# Altium PCB 垃圾分类组2.PcbDoc
Units mil, origin at the board's own origin, x right, y up, seen from the top; angles counter-clockwise.
Board outline 2362.2 x 3937.01 mil, 2 copper layers (Top Layer, Bottom Layer); 56 components, 33 nets, 284 pads, 48 vias.
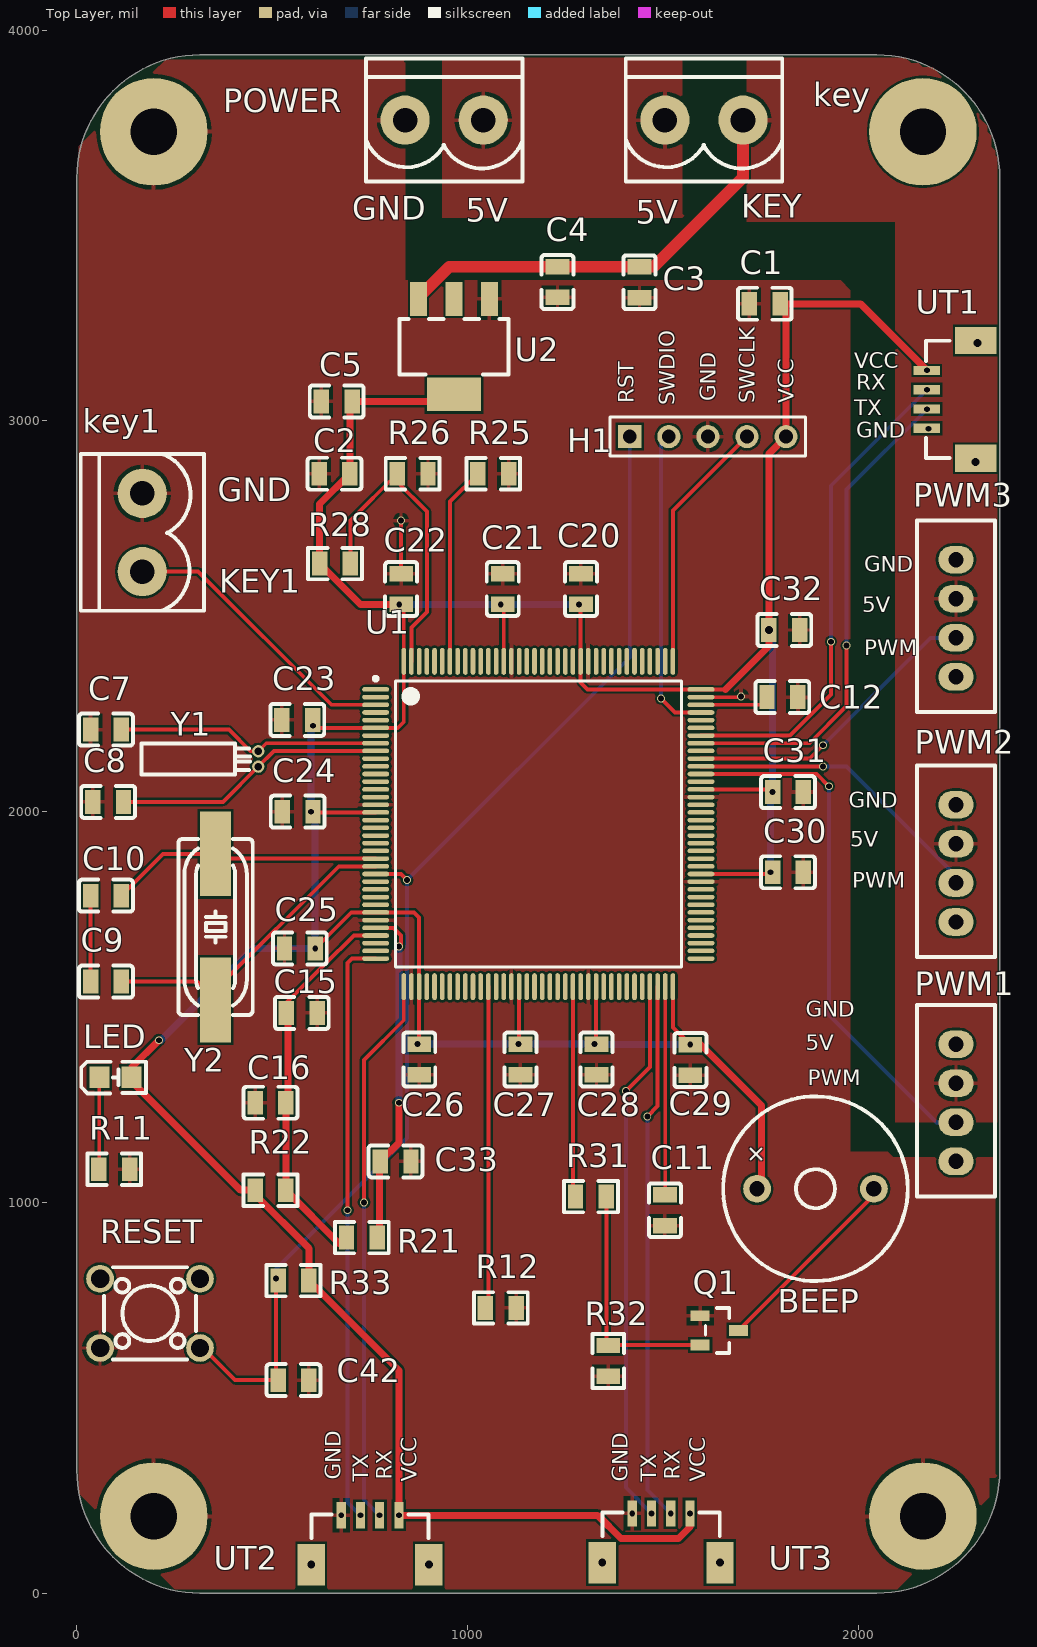
[diagram p0: Top Layer view]
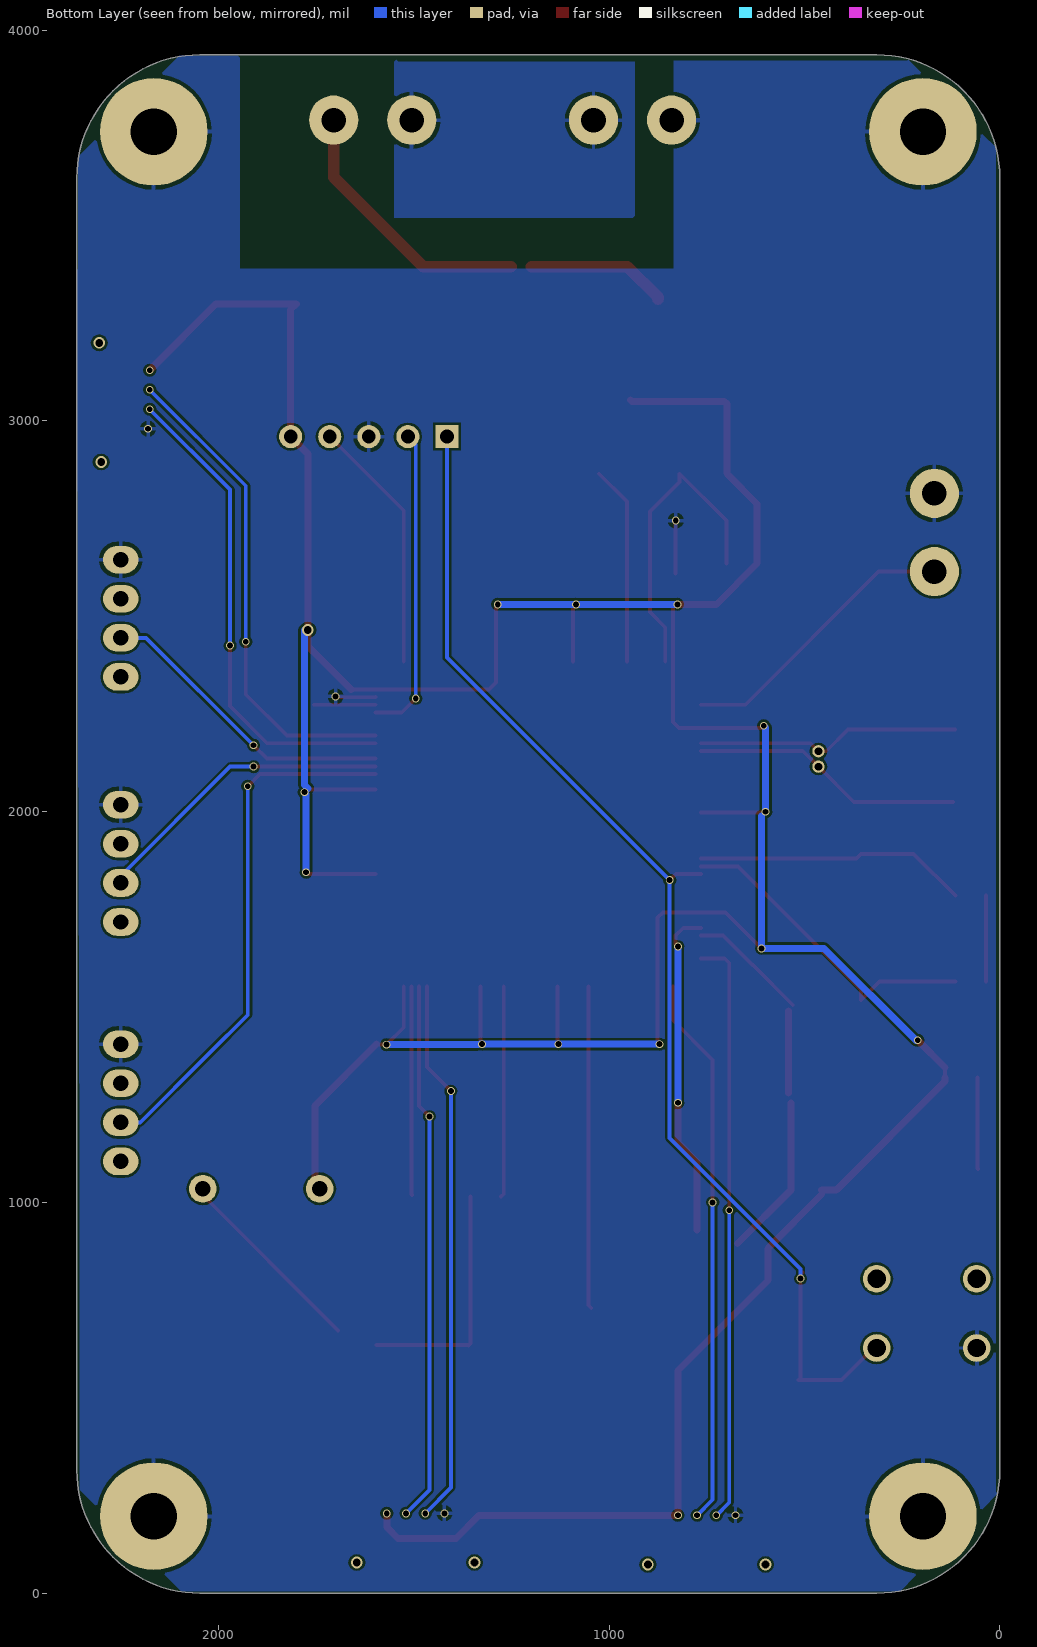
[diagram p1: Bottom Layer view, seen from below]

## Layer stack, top to bottom
Top Solder: solder mask 0.4, Solder Resist, Dk 3.5
Top Layer: signal copper 1.4
Dielectric 1: dielectric 12.6, FR-4, Dk 4.8
Bottom Layer: signal copper 1.4
Bottom Solder: solder mask 0.4, Solder Resist, Dk 3.5

## Board outline
0,314.96 0,3622.05 cw(c314.96,3622.05) 314.96,3937.01 2047.24,3937.01 cw(c2047.24,3622.05) 2362.2,3622.05 2362.2,314.96 cw(c2047.24,314.96) 2047.24,0 314.96,0 cw(c314.96,314.96)

## Design rules (kind name [scope] priority, off if disabled: settings)
Clearance [All] p1: gap=6 ignorepadtopadclearanceinfootprint=FALSE
PolygonConnect [All] p1: connectstyle=Relief reliefconductorwidth=10 reliefentries=4 polygonreliefangle="90 Angle" airgapwidth=10
RoutingVias [All] p1: holewidth=15 width=20 viastyle="Through Hole" minholewidth=15 minwidth=20 maxholewidth=15 maxwidth=20
SolderMaskExpansion [All] p1: expansion=4 istentingtop=FALSE
UnpouredPolygon [All] p1: allowshelved=TRUE
Width Width_1 [InNet('VCC')] p1: maxlimit=50 minlimit=10 preferedwidth=30 minimp=50.000000 maximp=50.000000 favimp=50.000000
Width [All] p2: maxlimit=30 minlimit=10 preferedwidth=10 minimp=50.000000 maximp=50.000000 favimp=50.000000
29 further rules are at their usual default settings.

## Components (designator, comment, footprint, x,y, rotation, side; value= is the part's Value field where it differs from the comment)
BEEP "" 蜂鸣器 1898.52,1038.78 r0 top
C1 "104" C0805 1760.63,3300 r180 top
C2 "104" C0805 659.37,2865 r180 top
C3 "106" C0805 1440,3355 r270 top
C4 "104" C0805 1230,3355.63 r270 top
C5 "106" C0805 665,3050 r180 top
C7 "12pF" C0805 74.37,2210 r0 top
C8 "12pF" C0805 80,2025 r0 top
C9 "22pF" C0805 74.37,1565 r180 top
C10 "22pF" C0805 74.37,1785 r180 top
C11 "225" C0805 1505,980 r270 top
C12 "225" C0805 1805.63,2293.31 r0 top
C15 "104" C0805 575.63,1485 r180 top
C16 "106" C0805 495.63,1255 r0 top
C20 "104" C0805 1290,2570 r90 top
C21 "104" C0805 1090,2570 r90 top
C22 "104" C0805 830,2570 r90 top
C23 "104" C0805 564.11,2235 r180 top
C24 "104" C0805 565,2000 r180 top
C25 "104" C0805 570.63,1650 r180 top
C26 "104" C0805 876.38,1365.63 r270 top
C27 "104" C0805 1135,1365.63 r270 top
C28 "104" C0805 1330,1365.63 r270 top
C29 "104" C0805 1570,1364.37 r270 top
C30 "104" C0805 1820,1845 r0 top
C31 "104" C0805 1820,2050 r0 top
C32 "104" C0805 1810.63,2465 r0 top
C33 "104" C0805 815.63,1105 r0 top
C42 "104" C0805 554.37,545 r180 top
H1 "" HDR1X5 1415,2960 r0 top
key "" Porwer 1605.39,3787.48 r180 top
key1 "" Porwer 150,2715 r270 top
LED "" LED0805BLUE 94.1,1319.45 r0 top
POWER "" Porwer 940.39,3787.48 r180 top
PWM1 "" XH2.54-4 2235,1250 r90 top
PWM2 "" XH2.54-4 2235,1862.72 r90 top
PWM3 "" XH2.54-4 2235,2490 r90 top
Q1 "S8050" S8050 1640,675 r180 top
R11 "680R" R0805 95.63,1085 r180 top
R12 "10K" R0805 1085,730 r0 top
R21 "0R" R0805 729.37,910 r180 top
R22 "0R" R0805 495.63,1031.22 r180 top
R25 "10K" R0805 1065.63,2865 r0 top
R26 "NC" R0805 859.37,2865 r0 top
R28 "0R" R0805 660.63,2635 r180 top
R31 "1K" R0805 1315.63,1015 r0 top
R32 "1K" R0805 1360,594.37 r90 top
R33 "10K" R0805 554.37,800 r0 top
RESET "Key" "KEY - duplicate" 190,730 r180 top
U1 "STM32F407ZET6" LQFP144N 1181.1,1968.5 r0 top
U2 "AMS1117-3.3V" ASM1117（yyh） 960,3195 r90 top
UT1 "" GH1.25_4P 2239.14,3060.13 r90 top
UT2 "" GH1.25_4P 755,135 r0 top
UT3 "" GH1.25_4P 1500,140 r0 top
Y1 "32.768k" 晶振（32.768MHz） 320,2135 r0 top value=8MHz
Y2 "8MHz" 晶振（8MHz） 355,1705 r270 top

## Footprints (in the part's own frame and the unit in brackets; to place one, negate y for a bottom-side part, rotate by r counter-clockwise, add the part's x,y. Pads: shape width x height; smd on the part's side, far side on the other; paste and mask are expansions set on the pad)
ASM1117（yyh） [mm]
  rect 2.2x1.1 smd: 1(2.98,-2.433) 2(2.98,-0.133) 3(2.98,2.167)
  rect 2.2x3.5 smd: 4(-3.218,-0.133)
  silkscreen extent -1.92,-3.68 1.68,3.42
C0805 [mm]
  rect 1x1.55 smd: 1(-1,0) 2(1,0)
  silkscreen extent -1.75,-1.04 1.75,1.04
GH1.25_4P [mil]
  rect 23.6x67 smd: 1(-78.54,64.14) 2(-29.34,64.14) 3(19.87,64.14) 4(69.08,64.14)
  rect 70x106.3 smd: 5(145.85,-61.85) 6(-155.32,-61.85)
  silkscreen extent -155,6 145,66
HDR1X5 [mm] "Connector; Header; 5 Position"
  rect 1.5x1.5 hole 0.9: 1(0,0)
  round 1.5 hole 0.9: 2(2.54,0) 3(5.08,0) 4(7.62,0) 5(10.16,0)
  silkscreen extent -1.27,-1.27 11.43,1.27
"KEY - duplicate" [mm]
  round 1.8 hole 1.2: 1(-3.178,2.606) 2(3.322,2.606) 3(-3.178,-1.894) 4(3.322,-1.894)
  silkscreen extent -2.93,-2.64 3.07,3.36
LED0805BLUE [mil]
  rect 51.2x55.1 smd: 1(45.9,0.55) 2(-36.8,0.55)
  silkscreen extent -83,-40 83,40
LQFP144N [mm]
  oval 1.75x0.297 smd: 1(-10.575,8.75) 2(-10.575,8.25) 3(-10.575,7.75) 4(-10.575,7.25) 5(-10.575,6.75) 6(-10.575,6.25) 7(-10.575,5.75) 8(-10.575,5.25) 9(-10.575,4.75) 10(-10.575,4.25) 11(-10.575,3.75) 12(-10.575,3.25) 13(-10.575,2.75) 14(-10.575,2.25) 15(-10.575,1.75) 16(-10.575,1.25) 17(-10.575,0.75) 18(-10.575,0.25) 19(-10.575,-0.25) 20(-10.575,-0.75) 21(-10.575,-1.25) 22(-10.575,-1.75) 23(-10.575,-2.25) 24(-10.575,-2.75) 25(-10.575,-3.25) 26(-10.575,-3.75) 27(-10.575,-4.25) 28(-10.575,-4.75) 29(-10.575,-5.25) 30(-10.575,-5.75) 31(-10.575,-6.25) 32(-10.575,-6.75) 33(-10.575,-7.25) 34(-10.575,-7.75) 35(-10.575,-8.25) 36(-10.575,-8.75) 73(10.575,-8.75) 74(10.575,-8.25) 75(10.575,-7.75) 76(10.575,-7.25) 77(10.575,-6.75) 78(10.575,-6.25) 79(10.575,-5.75) 80(10.575,-5.25) 81(10.575,-4.75) 82(10.575,-4.25) 83(10.575,-3.75) 84(10.575,-3.25) 85(10.575,-2.75) 86(10.575,-2.25) 87(10.575,-1.75) 88(10.575,-1.25) 89(10.575,-0.75) 90(10.575,-0.25) 91(10.575,0.25) 92(10.575,0.75) 93(10.575,1.25) 94(10.575,1.75) 95(10.575,2.25) 96(10.575,2.75) 97(10.575,3.25) 98(10.575,3.75) 99(10.575,4.25) 100(10.575,4.75) 101(10.575,5.25) 102(10.575,5.75) 103(10.575,6.25) 104(10.575,6.75) 105(10.575,7.25) 106(10.575,7.75) 107(10.575,8.25) 108(10.575,8.75)
  oval 0.297x1.75 smd: 37(-8.75,-10.575) 38(-8.25,-10.575) 39(-7.75,-10.575) 40(-7.25,-10.575) 41(-6.75,-10.575) 42(-6.25,-10.575) 43(-5.75,-10.575) 44(-5.25,-10.575) 45(-4.75,-10.575) 46(-4.25,-10.575) 47(-3.75,-10.575) 48(-3.25,-10.575) 49(-2.75,-10.575) 50(-2.25,-10.575) 51(-1.75,-10.575) 52(-1.25,-10.575) 53(-0.75,-10.575) 54(-0.25,-10.575) 55(0.25,-10.575) 56(0.75,-10.575) 57(1.25,-10.575) 58(1.75,-10.575) 59(2.25,-10.575) 60(2.75,-10.575) 61(3.25,-10.575) 62(3.75,-10.575) 63(4.25,-10.575) 64(4.75,-10.575) 65(5.25,-10.575) 66(5.75,-10.575) 67(6.25,-10.575) 68(6.75,-10.575) 69(7.25,-10.575) 70(7.75,-10.575) 71(8.25,-10.575) 72(8.75,-10.575) 109(8.75,10.575) 110(8.25,10.575) 111(7.75,10.575) 112(7.25,10.575) 113(6.75,10.575) 114(6.25,10.575) 115(5.75,10.575) 116(5.25,10.575) 117(4.75,10.575) 118(4.25,10.575) 119(3.75,10.575) 120(3.25,10.575) 121(2.75,10.575) 122(2.25,10.575) 123(1.75,10.575) 124(1.25,10.575) 125(0.75,10.575) 126(0.25,10.575) 127(-0.25,10.575) 128(-0.75,10.575) 129(-1.25,10.575) 130(-1.75,10.575) 131(-2.25,10.575) 132(-2.75,10.575) 133(-3.25,10.575) 134(-3.75,10.575) 135(-4.25,10.575) 136(-4.75,10.575) 137(-5.25,10.575) 138(-5.75,10.575) 139(-6.25,10.575) 140(-6.75,10.575) 141(-7.25,10.575) 142(-7.75,10.575) 143(-8.25,10.575) 144(-8.75,10.575)
  silkscreen extent -10.7,-9.3 9.3,9.57
Porwer [mil]
  round 125.98 hole 63: 1(-99.61,17.48) 2(100.39,17.48)
  silkscreen extent -200,-140 201,175
R0805 [mm]
  rect 1x1.55 smd: 1(-1,0) 2(1,0)
  silkscreen extent -1.75,-1.02 1.75,1.02
S8050 [mil]
  rect 49.21x27.56 smd: 1(45,-34.8) 2(45,40) 3(-53.4,2.6)
  silkscreen extent -30,-55 31,60
XH2.54-4 [mm]
  oval 1.8x2.3 hole 1: 1(3.937,-0.381) 2(1.397,-0.381) 3(-1.143,-0.381) 4(-3.683,-0.381)
  silkscreen extent -5.97,-2.92 6.48,2.16
晶振（8MHz） [mm]
  rect 5.5x2 smd: 1(-4.75,0) 2(4.75,0)
  silkscreen extent -5.72,-2.41 5.72,2.41
晶振（32.768MHz） [mm]
  round 0.8 hole 0.5: 1(3.664,0.5) 2(3.664,-0.5)
  silkscreen extent -3.94,-1 3.13,1
蜂鸣器 [mm]
  round 1.8 hole 1: 1(-4.006,-0.096) 2(3.594,-0.096)
  silkscreen extent -6.2,-6.1 5.79,5.9

## Part data
BEEP: library part BEEP
C1 C7 C8 C9 C10 C11 C12 C15 C16 C20 C21 C22 C23 C24 C25 C26 C27 C28 C29 C30 C31 C32 C33 C42: library part CAP, "Capcitor"
C2: library part Cap, "Capacitor", LatestRevisionDate=17-Jul-2002, LatestRevisionNote="Re-released for DXP Platform.", PackageReference=RAD-0.3, Published=8-Jun-2000, Publisher="Altium Limited"
C3 C4 C5: library part 0805C, "Capacitor", 0805=pf
H1: library part SWD
key key1: library part "Header 2", "Header, 2-Pin", LatestRevisionDate=17-Jul-2002, LatestRevisionNote="Re-released for DXP Platform.", Publisher="Altium Limited"
LED: library part LED2, "Typical RED, GREEN, YELLOW, AMBER GaAs LED", LatestRevisionDate=17-Jul-2002, LatestRevisionNote="Re-released for DXP Platform.", PackageDescription="SM LED; 2 Flat Leads", PackageReference=3.2X1.6X1.1, PackageVersion=Feb-2002, Published=8-Jun-2000, Publisher="Altium Limited"
POWER: library part dianyuan
PWM1 PWM2 PWM3: library part pwm
Q1: library part 2N3904, "NPN General Purpose Amplifier", ComponentLink1Description="Manufacturer Link", ComponentLink1URL=http://www.fairchildsemi.com/, ComponentLink2Description=Datasheet, ComponentLink2URL=http://www.fairchildsemi.com/ds/2N%2F2N3904.pdf, DatasheetVersion=1997, LatestRevisionDate=15-Jan-2003, LatestRevisionNote="PCB Footprint 'BCY-W3/D4.7' replaced", PackageDescription="TO, Flat Index; 3 In-Line, Axial Leads; Body Dia. 4.5mm; Leads 0.51 x 0.48 mm (max)", PackageReference=TO-92A, PackageVersion=Sep-1998, Published=8-Jun-2000, Publisher="Altium Limited"
R11 R12 R21 R22 R25 R26 R28 R31 R32 R33: library part Res2, "Resistor"
RESET: library part Jumper, "Jumper Wire", LatestRevisionDate=17-Jul-2002, LatestRevisionNote="Re-released for DXP Platform.", PackageReference=RAD-0.2, Published=24-Mar-1999, Publisher="Altium Limited"
U2: library part 11
UT1 UT2 UT3: library part GH1.25_4P_ckou
Y1: library part CRYSTAL, "Crystal 8MHz PLUG"
Y2: library part XTAL, "Crystal Oscillator"

## Free pads (board coordinates)
  round 275.59 hole 118.11: 3(196.85,196.85) 3(196.85,3740.16) 3(2165.35,196.85) 3(2165.35,3740.16)

## Via types
v1: diameter 20, hole 15, Top Layer to Bottom Layer, 41 vias
v2: diameter 30, hole 20, Top Layer to Bottom Layer, 7 vias

## Nets (pads, with @x,y where several pads share a name; then routed paths per layer and width w, separated by ;. In a path a pad name is that pad's centre, name@x,y a point inside that pad or via, vN(x,y) a via of type N, cw(c..) or ccw(c..) an arc to the next point about the centre after c; other vN are vias at no path point)
+5: key.2 POWER.1
BEEP: R31.1 U1.59 | length 539.9
  Top Layer w10: U1.59 1269.68,1021.58 R31.1
BOOT0: R25.1 U1.138 | length 509.8
  Top Layer w10: U1.138 954.72,2793.46 R25.1
BOOT1: R12.1 U1.48 | length 825.3
  Top Layer w10: R12.1 1053.15,737.52 U1.48
GND: C1.2 C2.2 C3.2 C4.2 C5.2 C7.1 C8.1 C11.2 C12.2 C15.1 C16.1 C20.2 C21.2 C22.2 C23.2 C24.2 C25.2 C26.2 C27.2 C28.2 C29.2 C30.2 C31.2 C32.2 C33.2 C42.1 H1.3 key1.1 pad.3 POWER.2 PWM1.1 PWM2.1 PWM3.1 Q1.1 R11.1 R12.2 R25.2 R26.2 R32.1 RESET.2 U1.16 U1.31 U1.38 U1.51 U1.61 U1.83 U1.94 U1.107 U1.120 U1.130 U2.1 UT1.1 UT2.1 UT3.1 | length 239.4
  Top Layer w10: v1(829.45,2745) 830,2744.45 C22.2 ; U1.107 1597.76,2292.99 1697.99,2292.99 v1(1700,2295)
  other v1: 676.46,199.14 1421.46,204.14 2180,2980
KEY: C3.1 C4.1 key.1 PWM1.2 PWM2.2 PWM3.2 U2.3 | length 1055.5
  Top Layer w30: U2.3 874.69,3316.42 953.27,3395 1198.74,3395 ; C4.1@1251.26,3395 1476.26,3395 1705,3623.74 key.1
KEY1: key1.2 U1.3 | length 738.5
  Top Layer w10: key1.2 310.39,2614.61 651.38,2273.62 U1.3
NetBEEP_2: BEEP.2 Q1.3 | length 507.1
  Top Layer w10: Q1.3 2051.48,1030.48 BEEP.2@2051.48,1031.22
NetC9_1: C9.1 U1.24 Y2.2 | length 828.1
  Top Layer w10: C9.1 307.99,1565 Y2.2 355,1545 670.24,1860.24 U1.24
NetC9_2: C9.2 C10.2 | length 220
  Top Layer w10: C9.2 C10.2
NetC10_1: C10.1 U1.23 Y2.1 | length 700.4
  Top Layer w10: C10.1 220.75,1892.01 Y2.1 367.09,1879.92 U1.23
NetC11_1: C11.1 U1.71 | length 533.2
  Top Layer w10: C11.1 1505.91,1020.28 U1.71
NetC12_1: C12.1 U1.106 | length 157.4
  Top Layer w10: U1.106 C12.1@1754.88,2273.62
NetLED_2: LED.2 R11.2 | length 235.4
  Top Layer w10: R11.2 57.3,1086.04 LED.2
NetQ1_2: Q1.2 R31.2 R32.2 | length 618.9
  Top Layer w10: R31.2 1355,638.74 R32.2 1361.26,635 Q1.2
NetR26_1: R26.1 R28.1 U1.143 | length 807.5
  Top Layer w10: R28.1 700,2745 R26.1 820,2843.9 895.67,2768.23 895.67,2510.94 856.3,2471.57 U1.143
PA2: U1.36 UT2.2 | length 1504.1
  Top Layer w10: v1(692.5,980) 692.5,1612.5 704.02,1624.02 U1.36
  Bottom Layer w10: v1(692.5,980) 692.5,232.3 v1(725.66,199.14)
PA3: U1.37 UT2.3 | length 1411.6
  Top Layer w10: v1(735,1000) 735,1364.69 836.61,1466.3 U1.37
  Bottom Layer w10: v1(735,1000) 735,239.01 v1(774.87,199.14)
PA9: U1.101 UT1.2 | length 1257.1
  Top Layer w10: U1.101 1875.2,2175.2 1970,2270 v1(1970,2425)
  Bottom Layer w10: v1(1970,2425) 1970,2824.14 v1(2175.86,3030)
PA10: U1.102 UT1.3 | length 1257.9
  Top Layer w10: U1.102 1824.88,2194.88 1930,2300 v1(1930,2435)
  Bottom Layer w10: v1(1930,2435) 1930,2834.14 v1(2175.86,3080)
PB10: U1.69 UT3.2 | length 1400.7
  Top Layer w10: v1(1405,1285) 1466.54,1346.54 U1.69
  Bottom Layer w10: v1(1405,1285) 1405,269.8 v1(1470.66,204.14)
PB11: U1.70 UT3.3 | length 1383.7
  Top Layer w10: v1(1460,1220) 1486.22,1246.22 U1.70
  Bottom Layer w10: v1(1460,1220) 1460,264.01 v1(1519.87,204.14)
PC7: PWM1.3 U1.97 | length 1364.5
  Top Layer w10: U1.97 1893.54,2096.46 v1(1925,2065)
  Bottom Layer w10: v1(1925,2065) 1925,1480 2025.18,1379.82 2200,1205 PWM1.3
PC8: PWM2.3 U1.98 | length 786.5
  Top Layer w10: U1.98 1909.18,2116.14 v1(1910,2115.32)
  Bottom Layer w10: v1(1910,2115.32) 1970,2115.32 2250,1835.32 PWM2.3
PC9: PWM3.3 U1.99 | length 782
  Top Layer w10: U1.99 1875.83,2135.83 v1(1910,2170)
  Bottom Layer w10: v1@1909,2171 v1(1910,2170) 2185,2445 PWM3.3
PC14: C7.2 U1.8 Y1.1 | length 681.2
  Top Layer w10: C7.2@115,2210 388.92,2210 444.23,2154.69 Y1.1 484.74,2175.2 U1.8
PC15: C8.2 U1.9 Y1.2 | length 699.5
  Top Layer w10: C8.2 373.91,2025 Y1.2 504.42,2155.51 U1.9
RESET: C42.2 H1.1 R33.1 RESET.1 U1.25 | length 3145.2
  Top Layer w10: RESET.1@305.12,657.4 305.12,644.88 405,545 C42.2 510,550 R33.1@510,790 ; R33.1@505,820.63 510,815.63 v1(510,805) ; U1.25 829.45,1840.55 v1(845,1825)
  Bottom Layer w10: v1(510,805) 510,830 845.08,1165.08 845.08,1663.7 845,1663.78 v1(845,1825) 1415,2395 H1.1
SWCLK: H1.4 U1.109 | length 653.6
  Top Layer w10: U1.109 1525.59,2770.59 H1.4
SWDIO: H1.2 U1.105 | length 795.9
  Top Layer w10: v1(1495,2289.67) 1530.73,2253.94 U1.105
  Bottom Layer w10: v1(1495,2289.67) 1495,2940 H1.2
VCC: BEEP.1 C1.1 C2.1 C5.1 C20.1 C21.1 C22.1 C23.1 C24.1 C25.1 C26.1 C27.1 C28.1 C29.1 C30.1 C31.1 C32.1 H1.5 LED.1 R22.2 R28.2 R33.2 U1.6 U1.17 U1.30 U1.39 U1.52 U1.62 U1.72 U1.84 U1.95 U1.108 U1.121 U1.131 U1.144 U2.4 UT1.4 UT2.4 UT3.4 | length 11037.7
  Top Layer w10: LED.1 LED.1@140,1345 ; R22.2@456.26,1020 R22.2 ; v1(599.37,2000) 601.34,1998.03 U1.17 ; v1(604.37,2220) 609.8,2214.57 U1.6 821.18,2214.57 836.61,2230 U1.144 836.61,2524.02 C22.1 ; v1(610,1650) 702.13,1742.13 U1.30 862.56,1742.13 875.98,1728.7 U1.39 875.98,1405.4 C26.1 ; C21.1 1092.52,2528.11 U1.131 ; v1(1130,1405) 1131.89,1406.89 U1.52 ; C20.1 1289.37,2530 U1.121 1289.37,2330.63 1307.01,2312.99 U1.108 1660,2312.99 ; U1.62 1328.74,1406.26 C28.1 ; U1.72 1525.59,1448.15 v1(1570,1403.74) 1593.74,1403.74 C29.1@1595,1405 ; U1.84 1771.18,1840.55 v1(1775.63,1845) ; U1.95 1773.54,2057.09 C31.1
  Top Layer w18: LED.1 140,1310 418.78,1031.22 R22.2 ; LED.1@140,1345 v1(210,1415) ; R22.2@456.26,1020 593.74,882.52 R33.2 824.08,569.66 v1(824.08,199.14) 1333.05,199.14 1392.19,140 1540,140 1569.08,169.08 v1(1569.08,204.14) ; v1(825,2530.63) 725.63,2530.63 R28.2 621.26,2787.52 C2.1 698.74,3044.37 C5.1 941.69,3050 U2.4@945,3053.31 ; C29.1@1595,1405 1752.27,1247.73 BEEP.1@1752.27,1031.22 ; 1660,2312.99 1771.26,2424.25 v2(1771.26,2465) 1771.26,2916.26 H1.5 1815,3285 C1.1 2005.86,3300 v1(2175.86,3130)
  Bottom Layer w10: v1(210,1415) v1@215,1415 ; v1(599.37,2000) 610,1989.37 ; v1@599.37,2215 v1(604.37,2220) ; v1(1325,1405) 1330,1410 1336.26,1403.74 ; v1@1775.63,2045.63 v1(1780,2050) v1@1775.63,2054.37
  Bottom Layer w18: v1@215,1415 450,1650 v1(610,1650) 610,1989.37 ; v1(599.37,2000) v1@599.37,2215 ; v1(825,2530.63) v1(1085,2530.63) v1(1285,2530.63) ; v1(871.38,1405) v1(1130,1405) v1(1325,1405) ; 1336.26,1403.74 v1(1570,1403.74) ; v1(1775.63,1845) v1@1775.63,2045.63 ; v1@1775.63,2054.37 1770.63,2059.37 1780,2068.74 v2@1780,2465
VDDA: C15.2 C16.2 R21.2 R22.1 U1.33 | length 934.9
  Top Layer w10: C15.2@530,1505 633.49,1608.49 634.24,1608.49 708.82,1683.07 U1.33
  Top Layer w18: C16.2 R22.1 R21.2@671.22,895 ; C16.2@540.63,1280 C15.2@540.63,1490
VREF+: C33.1 R21.1 U1.32 | length 849.2
  Top Layer w10: U1.32 810.31,1702.76 830,1683.07 830,1660.92 v1(824.08,1655) ; C33.1@775,1103.74 C33.1
  Top Layer w18: R21.1@775,930 C33.1@775,1103.74 ; C33.1 824.08,1152.82 v1(824.08,1255)
  Bottom Layer w18: v1(824.08,1255) v1(824.08,1655)
pads on no net: PWM1.4 PWM2.4 PWM3.4 RESET.3 RESET.4 U1.1 U1.2 U1.4 U1.5 U1.7 U1.10 U1.11 U1.12 U1.13 U1.14 U1.15 U1.18 U1.19 U1.20 U1.21 U1.22 U1.26 U1.27 U1.28 U1.29 U1.34 U1.35 U1.40 U1.41 U1.42 U1.43 U1.44 U1.45 U1.46 U1.47 U1.49 U1.50 U1.53 U1.54 U1.55 U1.56 U1.57 U1.58 U1.60 U1.63 U1.64 U1.65 U1.66 U1.67 U1.68 U1.73 U1.74 U1.75 U1.76 U1.77 U1.78 U1.79 U1.80 U1.81 U1.82 U1.85 U1.86 U1.87 U1.88 U1.89 U1.90 U1.91 U1.92 U1.93 U1.96 U1.100 U1.103 U1.104 U1.110 U1.111 U1.112 U1.113 U1.114 U1.115 U1.116 U1.117 U1.118 U1.119 U1.122 U1.123 U1.124 U1.125 U1.126 U1.127 U1.128 U1.129 U1.132 U1.133 U1.134 U1.135 U1.136 U1.137 U1.139 U1.140 U1.141 U1.142 U2.2 UT1.5 UT1.6 UT2.5 UT2.6 UT3.5 UT3.6
copper on no net:
  other v2: 599.68,73.15 900.85,73.15 1344.68,78.15 1645.85,78.15 2300,2895 2305,3200

## Polygon pours and split planes (outlines as drawn)
GND on Top Layer "GND" (solid, pour order 4): 845,3920 840,3925 226.86,3925 5,3703.14 5,255 250,10 2100,10 2335,245 2335,295 2350,295 2355,300 2350,305 2350,1115 2090,1115 2075,1130 1980,1130 1980,3335 1955,3360 840,3360 840,3916.61 836.61,3920
KEY on Top Layer "KEY" (solid, pour order 2): 1715,3927.5 1717.5,3930 2120,3930 2135,3915 2155,3915 2165,3905 2190,3905 2310,3785 2310,3775 2330,3755 2330,3740 2340,3730 2340,3702.15 2350,3692.15 2350,3680 2355,3675 2355,1205 2095,1205 2095,3510 1715,3510
+5 on Top Layer "5V" (solid, pour order 0): 935,3930 935.04,3929.96 935.04,3520 1550,3520 1555,3525 1550,3530 1550,3930 940,3930 935,3925
GND on Bottom Layer "GND" (solid, pour order 8): 835,3390 2362.22,3390 2355,1115 2355,265 2095,5 255,5 5,255 10,260 10,3700 235,3925 237.5,3922.5 835,3922.5
GND on Bottom Layer "GND" (solid, pour order 12): 1950,3935 1945,3930 1945,3390 2358.68,3390 2358.68,3676.32 2100,3935
+5 on Bottom Layer "GND" (solid, pour order 6): 1550,3520 1550,3920 1545,3925 1540,3920 935,3920 935,3525 940,3520

## Silkscreen, mask and mechanical layers (free items; w line width, h text height)
Top Overlay:
  text "KEY" at 1700.63,3520 h60
  text "GND" at 705,3515 h60
  text "5V" at 995,3510 h60
  text "5V" at 1430,3505 h60
  text "VCC" at 1990,3135 h40
  text "RX" at 1995,3080 h40
  text "GND" at 1635,3050 h40 r90
  text "RST" at 1425,3045 h40 r90
  text "SWCLK" at 1735,3045 h40 r90
  text "VCC" at 1835,3045 h40 r90
  text "SWDIO" at 1530,3040 h40 r90
  text "TX" at 1990,3015 h40
  text "GND" at 1995,2956.89 h40
  text "GND" at 360,2795 h60
  text "GND" at 2015,2614.61 h40
  text "KEY1" at 365,2560 h60
  text "5V" at 2010,2510 h40
  text "PWM" at 2015,2400 h40
  text "GND" at 1975,2010 h40
  text "5V" at 1980,1910 h40
  text "PWM" at 1985,1805 h40
  text "GND" at 1865,1475 h40
  text "5V" at 1865,1390 h40
  text "PWM" at 1870,1300 h40
  text "GND" at 675.32,290 h40 r90
  text "RX" at 805.32,290 h40 r90
  text "RX" at 1542.7,290 h40 r90
  text "TX" at 745.32,285 h40 r90
  text "VCC" at 870.32,285 h40 r90
  text "GND" at 1410,285 h40 r90
  text "TX" at 1482.7,285 h40 r90
  text "VCC" at 1607.7,285 h40 r90
Mechanical 1:
  the board outline again, w10

## Text inside footprints (layer, text, board x,y; h text height)
BEEP: Top Overlay "+" at 1733.08,1086.82 h50 r45